# EAGLE board barath pcb 1 (EAGLE 6.5.0)
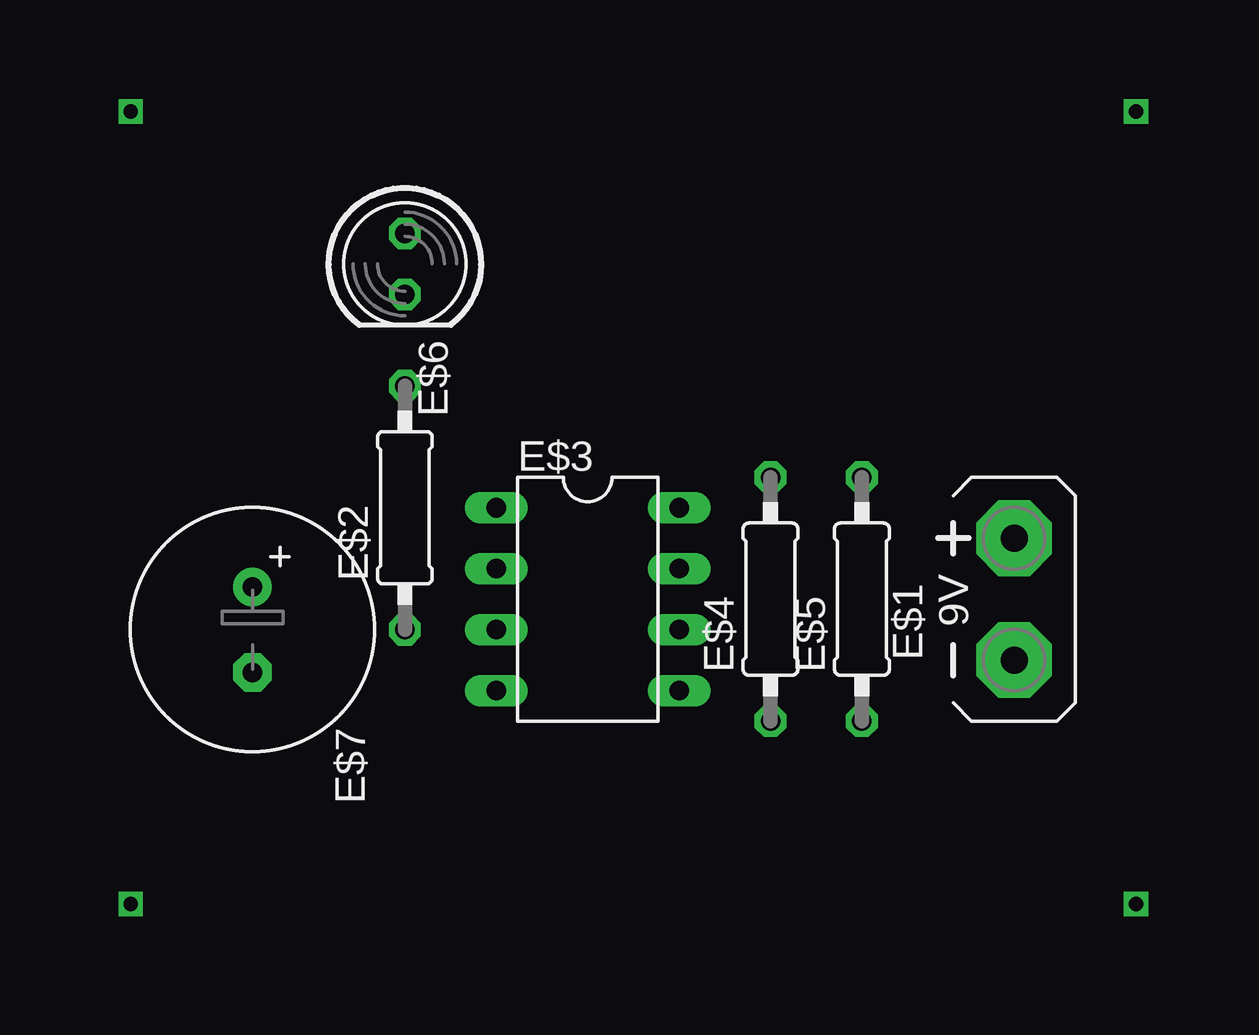
[diagram p0: board, top side]
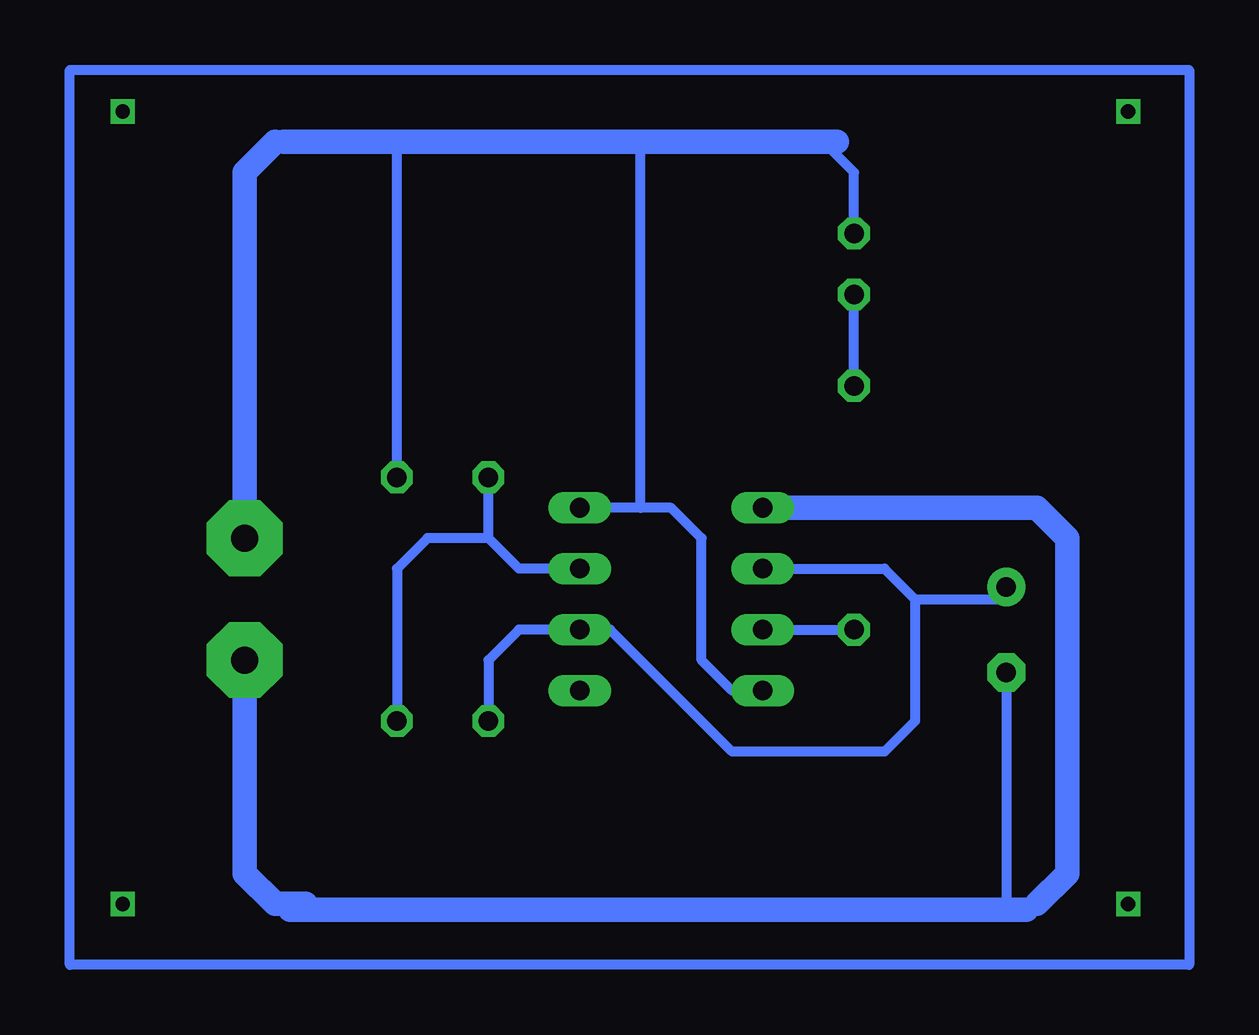
[diagram p1: board, bottom side, seen from below]

No outline drawn. Coordinates in mm, seen from the top.
Copper layers (1*16): Top 0.035mm / dielectric 1.5mm / Bottom 0.035mm
Design rules "default": minimum track width 10mil, minimum drill 24mil, track to track 8mil, track to pad 8mil, pad to pad 8mil, via to via 8mil, smd to smd 8mil, copper to edge 40mil, drill to drill 8mil, minimum pad ring 10mil, minimum via ring 8mil, stop-mask expansion 4mil, vias tented up to drill 0mil, thermal gap 10mil

## Footprints (pad centres in the part's own frame; a part is rotated, then mirrored left to right if it is on the bottom)
AB9V = drill 1.118 pad 3.15 octagon: + 0,2.54; - 0,-2.54
0207/10 = drill 0.813 octagon: 1 -5.08,0; 2 5.08,0
DIL08 = drill 0.813 long: 1 -3.81,-3.81; 2 -1.27,-3.81; 3 1.27,-3.81; 4 3.81,-3.81; 5 3.81,3.81; 6 1.27,3.81; 7 -1.27,3.81; 8 -3.81,3.81
LED5MM = drill 0.813 octagon: A -1.27,0; K 1.27,0
E3,5-10 = drill 0.813 pad 1.6: + -1.778,0 | drill 0.813 pad 1.6 octagon: - 1.778,0

## Placement (x,y rotation side)
E$1  [AB9V]  68.58,27.94 0 top
E$2  [0207/10]  43.18,31.75 90 top
E$3  [DIL08]  50.8,27.94 270 top
E$4  [0207/10]  58.42,27.94 90 top
E$5  [0207/10]  62.23,27.94 90 top
E$6  [LED5MM]  43.18,41.91 270 top
E$7  [E3,5-10]  36.83,26.67 270 top

## Library data of the parts
E$1 = battery
E$2 E$4 E$5 E$7 = resistor
E$3 = ic-package
E$6 = led

## Nets
S$2: E$3.4 E$3.8
S$3: E$3.2 E$3.6 E$4.1
S$6: E$2.1 E$3.3
S$7: E$2.2 E$6.K
S$8: E$6.A
S$9: E$3.7 E$4.2 E$5.1
S$10: E$3.1
S$11: E$5.2
S$12: E$1.+
S$13: E$1.-

## Tracks (layer width: path | path; a pad name or v marks a point on that pad's centre or on a via)
S$1
  Bottom 0.406: 29.21,12.7 75.87,12.7 75.87,50 29.21,50 29.21,12.7
S$2
  Bottom 0.406: E$3.4 48.26,24.13 49.53,25.4 49.53,30.48 50.8,31.75 52.07,31.75 | 52.07,31.75 E$3.8 | 52.07,31.75 52.07,46.99
S$3
  Bottom 0.406: E$3.2 41.91,29.21 40.64,27.94 | 40.64,27.94 40.64,22.86 41.91,21.59 48.26,21.59 53.34,26.67 E$3.6 57.15,26.67 58.42,25.4 E$4.1 | 40.64,27.94 36.83,27.94
S$4
  Bottom 1.016: 43.89,47 66.95,47
S$5
  Bottom 1.016: 36,15 66.68,15
S$6
  Bottom 0.406: E$3.3 E$2.1
S$7
  Bottom 0.406: E$2.2 E$6.K
S$8
  Bottom 0.406: E$6.A 43.18,45.72 44.45,46.99
S$9
  Bottom 0.406: E$3.7 57.15,29.21 58.42,30.48 | 58.42,30.48 E$4.2 | 58.42,30.48 60.96,30.48 62.23,29.21 E$5.1
S$10
  Bottom 0.406: 36.83,25.4 36.83,15.24 35.56,15.24
  Bottom 1.016: E$3.1 35.56,31.75 34.29,30.48 34.29,16.51 35.56,15.24
S$11
  Bottom 0.406: E$5.2 62.23,46.99
S$12
  Bottom 1.016: E$1.+ 68.58,45.72 67.31,46.99
S$13
  Bottom 1.016: E$1.- 68.58,16.51 67.31,15.24 66.04,15.24
S$14  (via drill 0.6)
  other vias: 31.75,48.26
S$15  (via drill 0.6)
  other vias: 73.66,48.26
S$16  (via drill 0.6)
  other vias: 73.66,15.24
S$17  (via drill 0.6)
  other vias: 31.75,15.24